# Altium PCB MINI_SYSTEM.PcbDoc
Units mil, origin at the board's own origin, x right, y up, seen from the top; angles counter-clockwise.
Board outline 1975.53 x 1581.83 mil, 2 copper layers (Top Layer, Bottom Layer); 48 components, 63 nets, 298 pads, 122 vias.
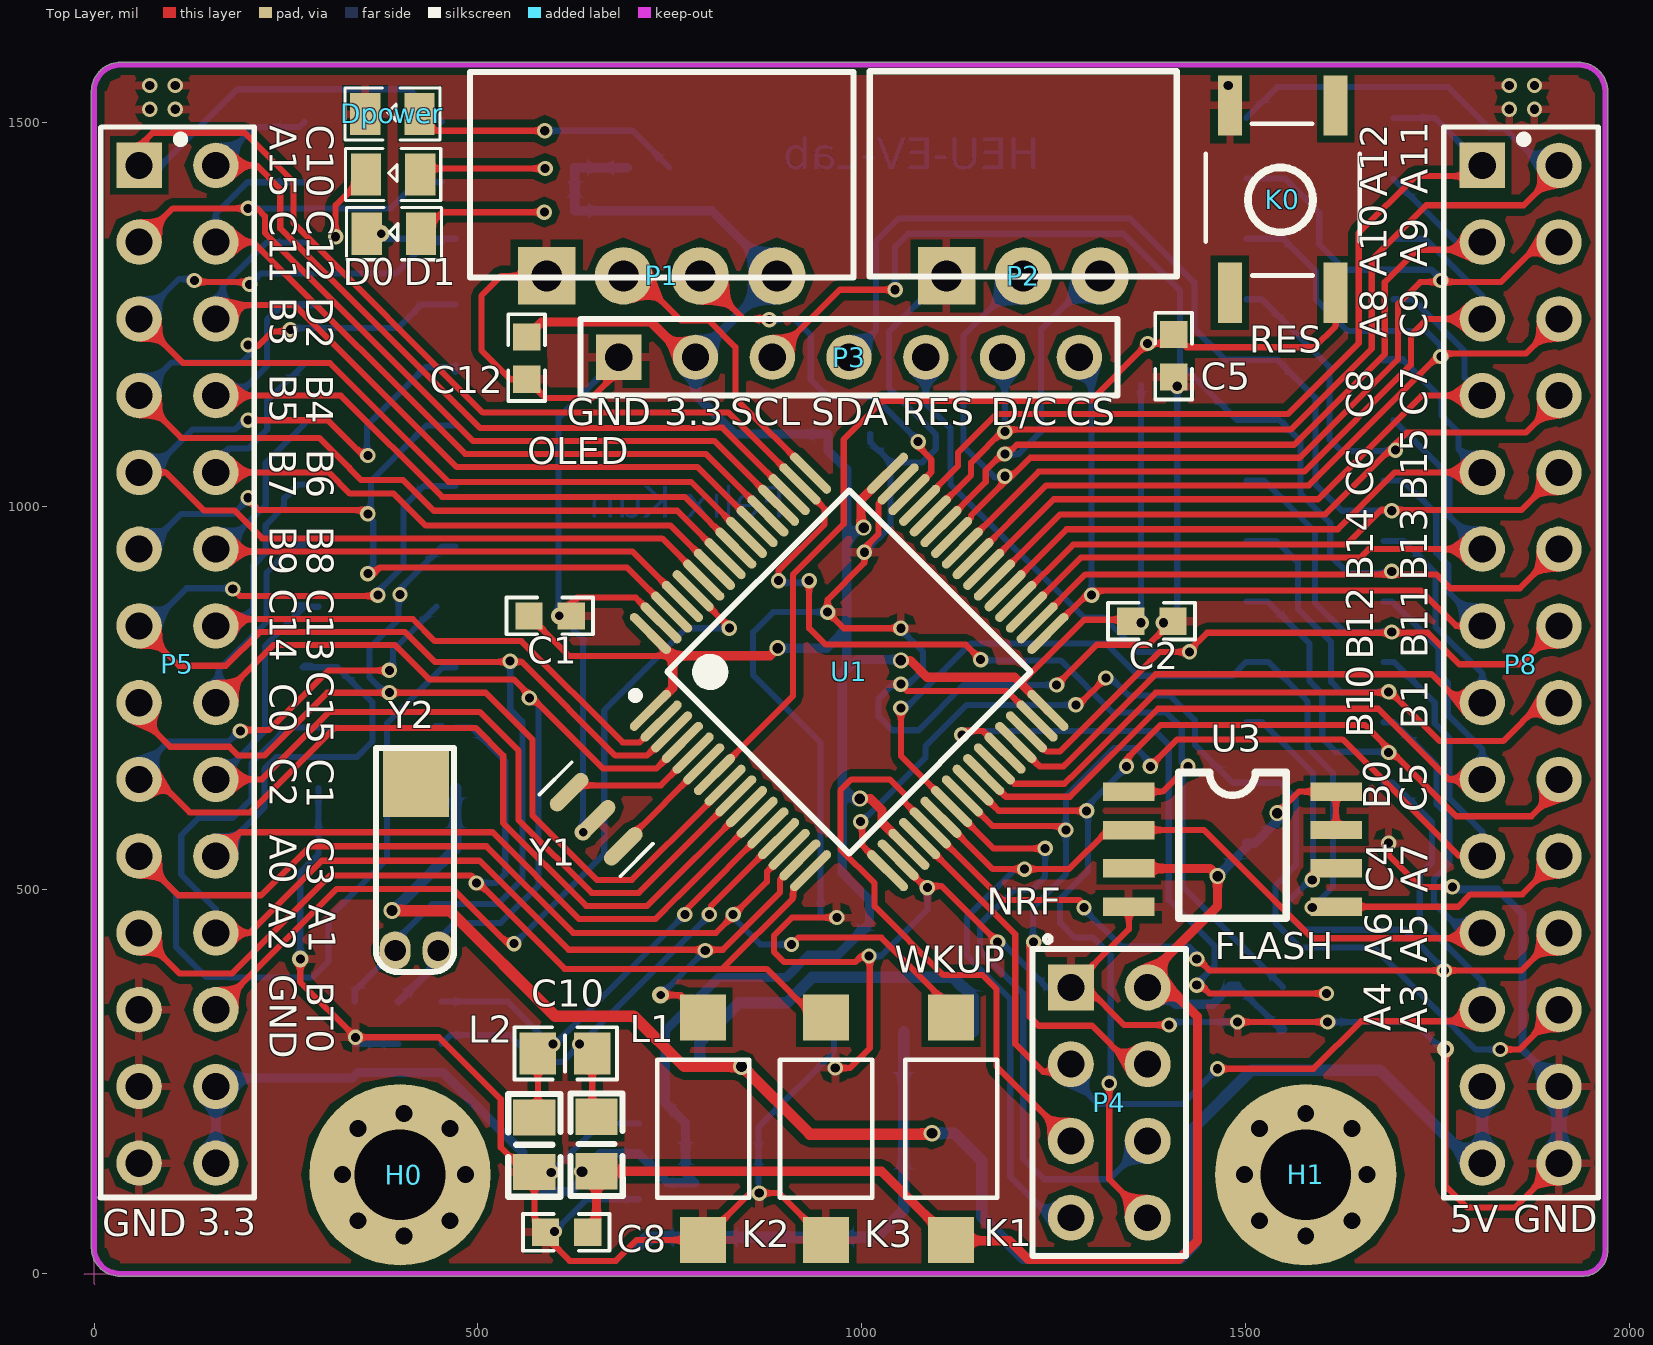
[diagram p0: Top Layer view]
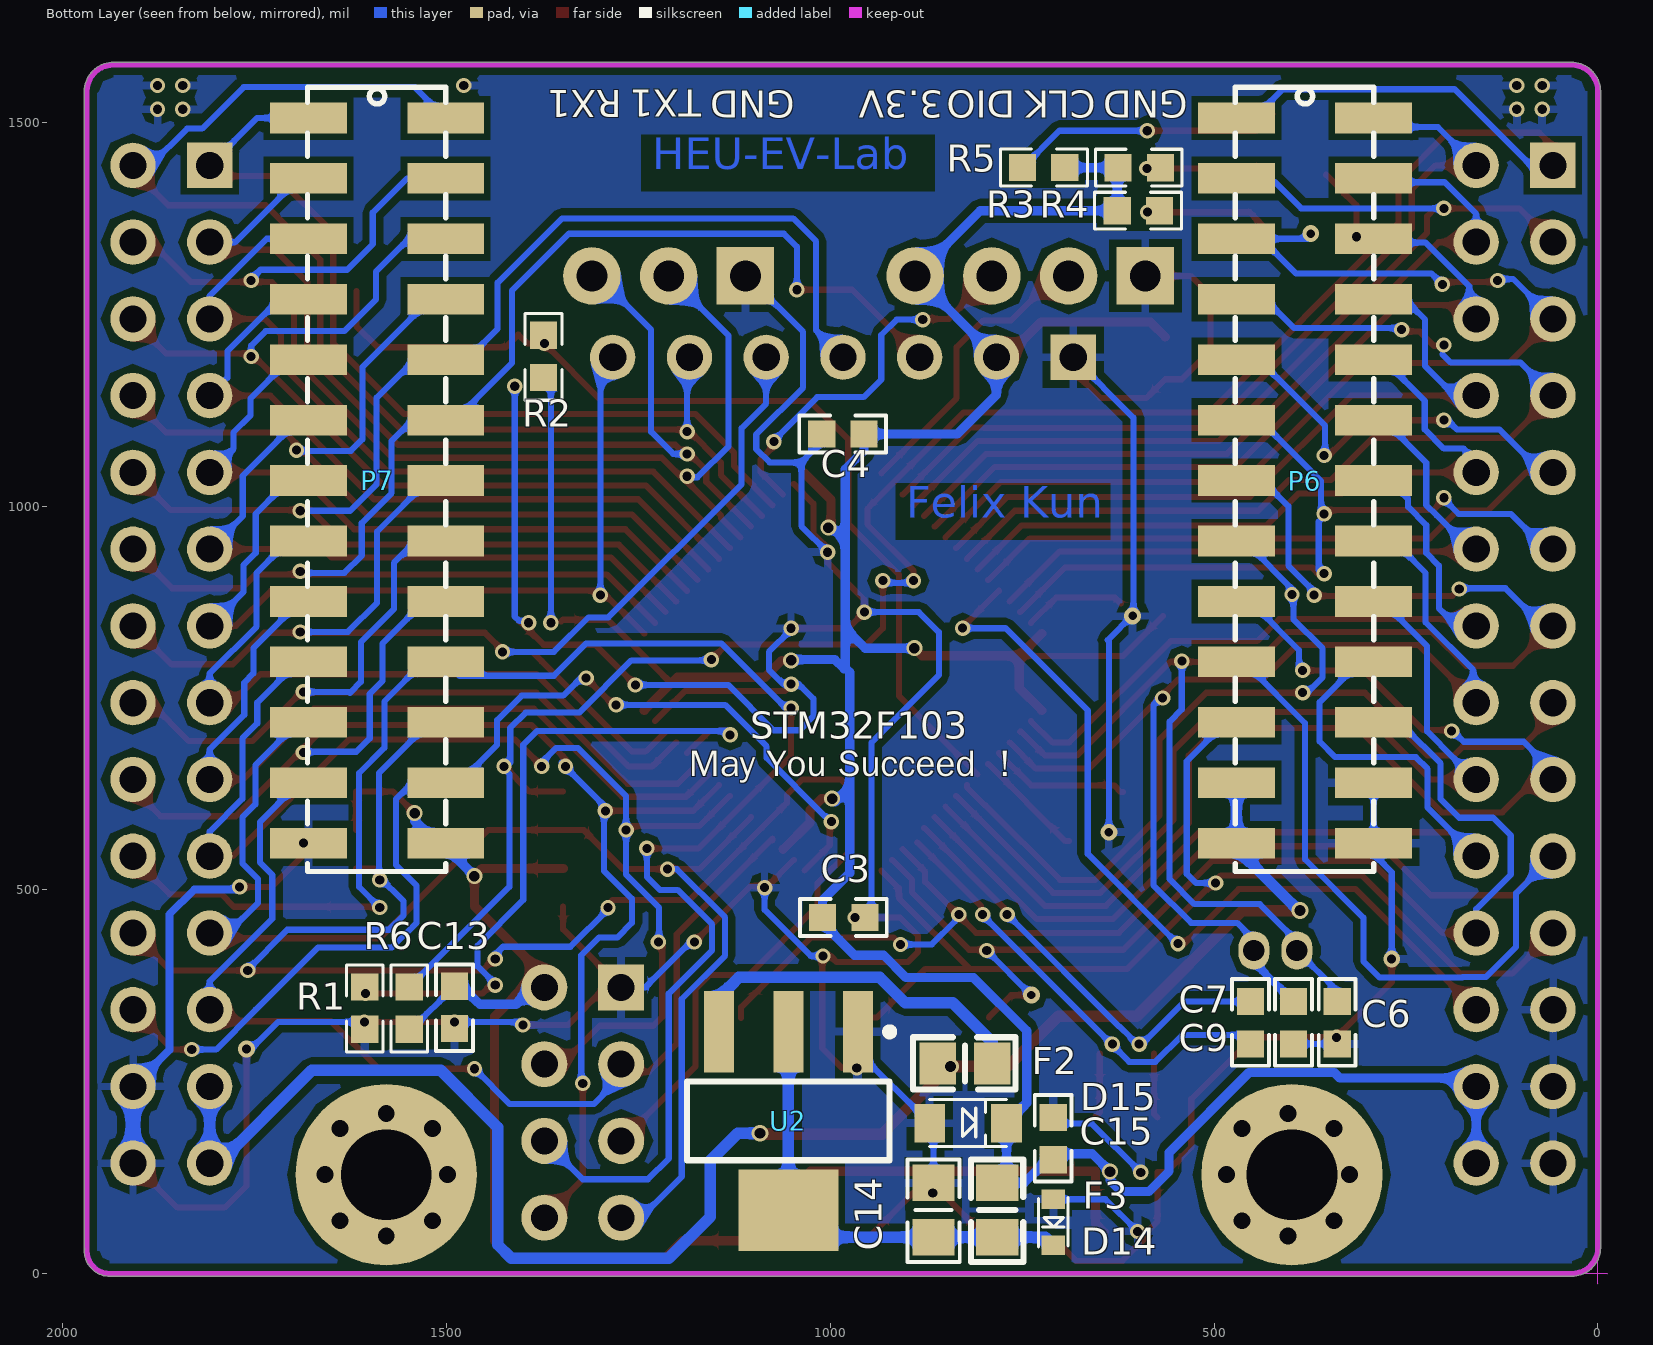
[diagram p1: Bottom Layer view, seen from below]
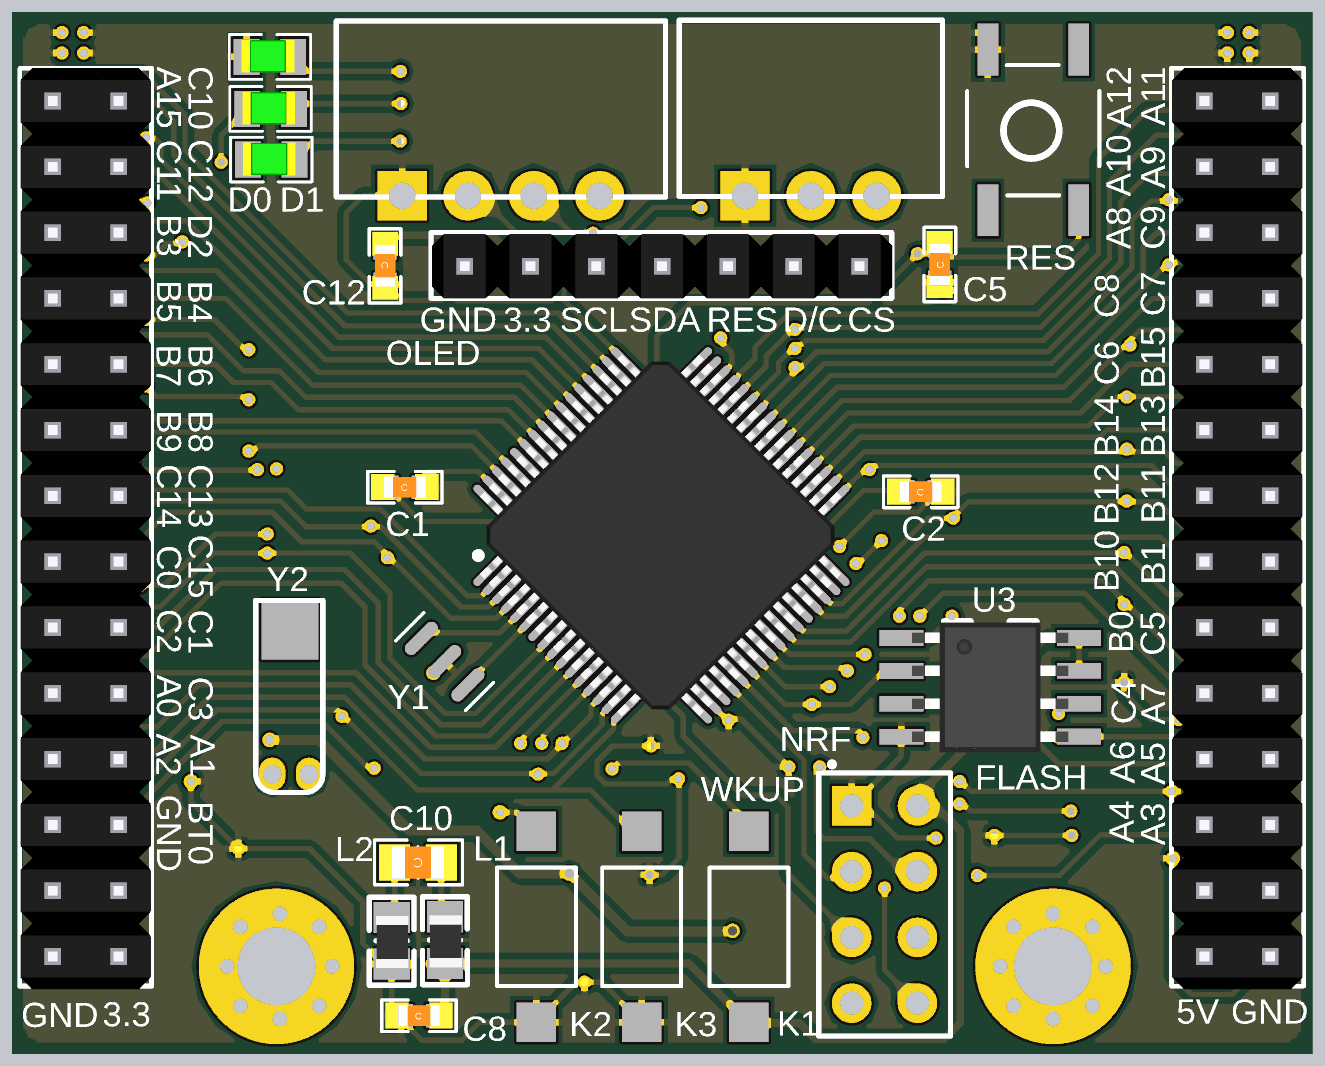
[diagram p2: 3D render of the assembled board from above, using the file's embedded part models]
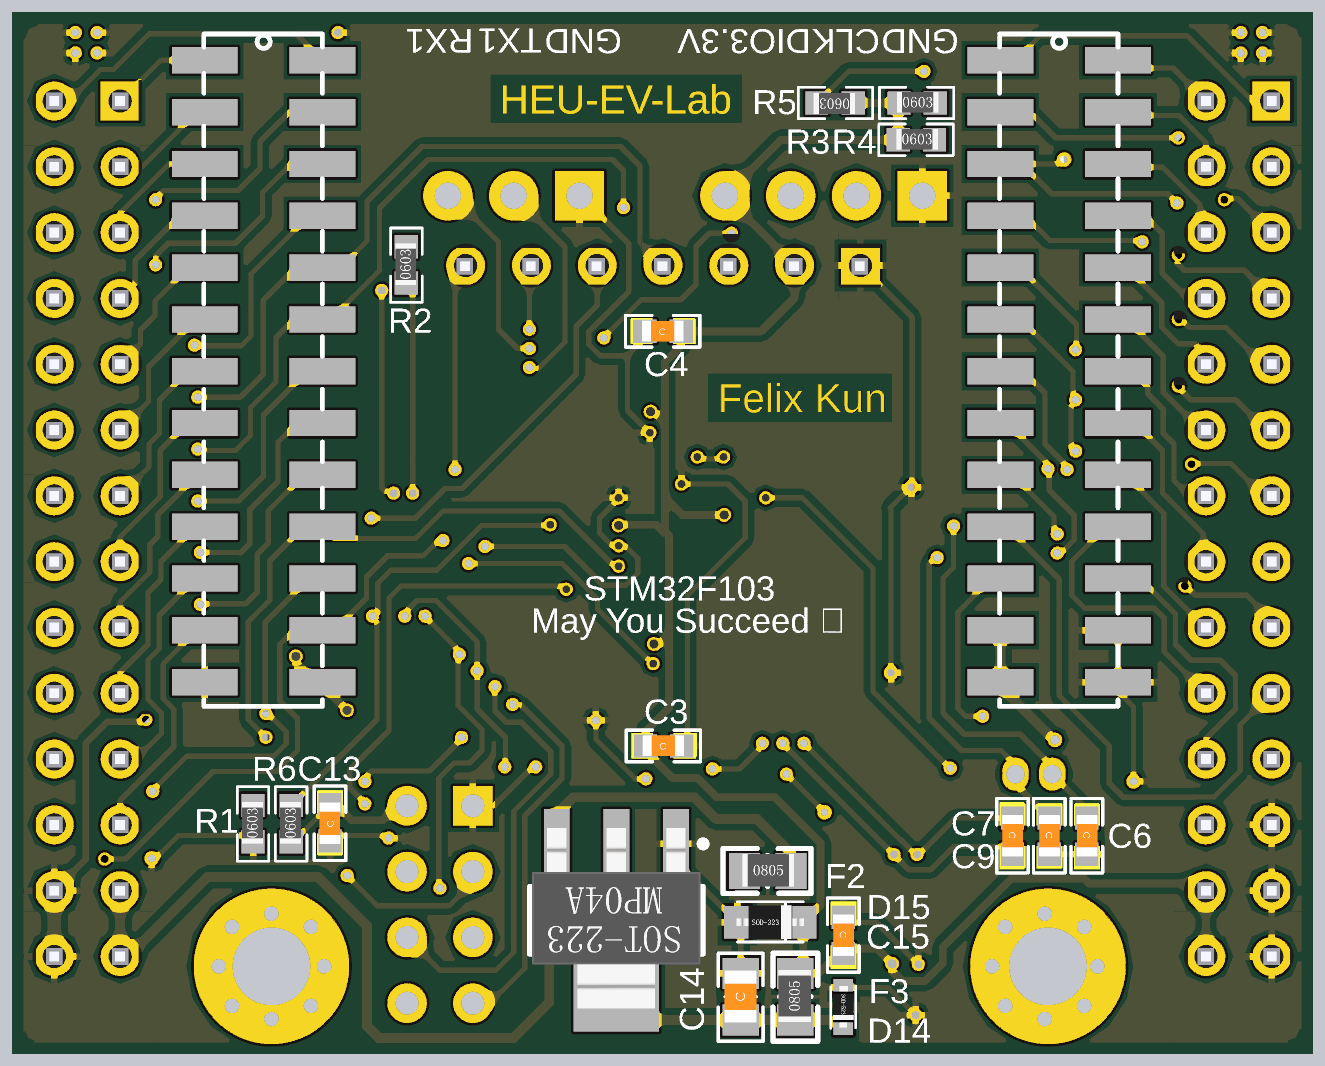
[diagram p3: 3D render of the assembled board from below, using the file's embedded part models]

## Layer stack, top to bottom
Top Solder: solder mask 0.4, Solder Resist, Dk 3.5
Top Layer: signal copper 1.4
Dielectric 1: dielectric 12.6, FR-4, Dk 4.8
Bottom Layer: signal copper 1.4
Bottom Solder: solder mask 0.4, Solder Resist, Dk 3.5

## Board outline
-3.52,33.9 ccw(c33.9,33.9) 33.9,-3.52 ccw(c33.9,0) 34.15,-3.51 ccw(c34.41,0) 34.41,-3.52 1938.5,-3.52 ccw(c1938.5,30) 1972.02,30 ccw(c1968.5,30) 1971.43,31.95 ccw(c1968.5,33.9) 1972.02,33.9 1972.02,1540.39 ccw(c1968.5,1540.39) 1972.02,1540.42 ccw(c1933.8,1540.1) 1933.48,1578.32 ccw(c1933.8,1540.1) 1933.47,1578.32 1933.5,1578.32 34.41,1578.32 ccw(c34.41,1540.39) -3.52,1540.39

## Design rules (kind name [scope] priority, off if disabled: settings)
Clearance MCU_Clearance [WithinRoom('MCU') vs WithinRoom('MCU')] p1: gap=5
Clearance [All] p2: gap=9
HoleSize [All] p1: absolutevalues=TRUE maxlimit=300 minlimit=11.81 maxpercent=80.000 minpercent=20.000
HoleToHoleClearance HoleToHoleClearance_mcu [WithinRoom('MCU')] p1: gap=0 allowstackedmicrovias=TRUE
HoleToHoleClearance [All] p2: gap=4 allowstackedmicrovias=TRUE
MinimumSolderMaskSliver [All] p1: minsoldermaskwidth=0
NetAntennae [All] p1: netantennaetolerance=2
PolygonConnect [All] p1: connectstyle=Relief reliefconductorwidth=10 reliefentries=4 polygonreliefangle="90 Angle" airgapwidth=10
RoomDefinition MCU [WithinRoom('MCU')] p1: confinementstyle=ConfineOut formatcopy=TRUE lockcomponents=FALSE outline 607.32,780.72 983.5,1156.9 1354.73,785.67 978.55,409.49
RoutingCorners [All] p1: cornerstyle=Round minsetback=20 maxsetback=200
RoutingVias [All] p1: holewidth=11.8 width=20 viastyle="Through Hole" minholewidth=11.7 minwidth=18 maxholewidth=248.03 maxwidth=254
SilkToSilkClearance [All] p1: silktosilkclearance=0
SilkToSolderMaskClearance [IsPad] p1: minsilkscreentomaskgap=0 clearancetoexposedcopper=TRUE
SolderMaskExpansion [All] p1: expansion=4
Width [All] p1: maxlimit=50 minlimit=7 preferedwidth=8
23 further rules are at their usual default settings.

## Components (designator, comment, footprint, x,y, rotation, side; value= is the part's Value field where it differs from the comment)
C1 "0603" CAP_0603_16*08 594,857 r0 top
C2 "0603" CAP_0603_16*08 1378,850 r0 top
C3 "0603" CAP_0603_16*08 982.5,463.9 r180 bottom
C4 "0603" CAP_0603_16*08 983.5,1093.9 r180 bottom
C5 "0603" CAP_0603_16*08 1406.5,1195.9 r90 top
C6 "0603" CAP_0603_16*08 339.5,326.9 r270 bottom
C7 "0603" CAP_0603_16*08 396.5,326.9 r270 bottom
C8 "0603" CAP_0603_16*08 615.5,53.9 r0 top
C9 "0603" CAP_0603_16*08 452.5,326.9 r270 bottom
C10 "Polar" CAP_0805_20*12 613.5,286.9 r180 top
C12 "0603" CAP_0603_16*08 563.5,1192.9 r270 top
C13 "0603" CAP_0603_16*08 1489.5,346.9 r90 bottom
C14 "Polar" CAP_0805_20*12 865.5,82.9 r90 bottom
C15 "0603" CAP_0603_16*08 709.5,175.9 r270 bottom
D0 "Red" LED_0805 389.5,1431.9 r180 top
D1 "Blue" LED_0805 390.5,1354.9 r180 top
D14 "TVS/3.3V" SOD523 709.5,116.9 r270 bottom
D15 "Zener/3.3V" SOD323 820.5,195.9 r180 bottom
Dpower "Green" LED_0805 388.5,1510.9 r180 top
F2 "8V1A" RES_0805_20*12 824.5,273.9 r180 bottom
F3 "5V/0.5A" RES_0805_20*12 782.5,82.9 r90 bottom
H0 "Pad3mm" PAD#1 403.5,128.9 r0 top
H1 "Pad3mm" PAD#2 1578.5,128.9 r0 top
K0 "KEY" KEY_4 1548.5,1399.9 r270 top
K1 "KEY" KEY_2 1106.5,193.9 r180 top
K2 "KEY" KEY_2 783.5,193.9 r180 top
K3 "KEY" KEY_2 943.5,193.9 r180 top
L1 "MODEL?" IND_0805_20*12 654.5,168.9 r90 top
L2 "MODEL?" IND_0805_20*12 573.5,167.9 r90 top
P1 "Header 4" P4_OUT 739.5,1299.9 r0 top locked
P2 "Header 3" P3_OUT 1210.5,1299.9 r0 top locked
P3 "OLED" HEADER1*7_PIN 983.5,1193.9 r0 top
P4 "NRF2401" HDR2X4 1272.5,372.9 r270 top
P5 "HEADER" HEADER2*14 108.5,793.9 r270 top locked
P6 "Header" HEADER2*13_SMD 381.5,993.9 r270 bottom
P7 "Header" HEADER2*13_SMD 1590.5,993.9 r270 bottom
P8 "HEADER" HEADER2*14 1858.5,793.9 r270 top locked
R1 "SMD" RES_0603_16*08 1606.5,345.9 r90 bottom
R2 "SMD" RES_0603_16*08 1373.5,1194.9 r90 bottom
R3 "SMD" RES_0603_16*08 597.5,1440.9 r180 bottom
R4 "SMD" RES_0603_16*08 598.5,1384.9 r180 bottom
R5 "SMD" RES_0603_16*08 722,1441 r0 bottom
R6 "SMD" RES_0603_16*08 1548.5,345.9 r90 bottom
U1 "STM32F103RCT6" LQFP64_N 983.5,783.9 r45 top locked
U2 "AMS1117" SOT223_M 1054.5,198.9 r270 bottom
U3 "W25Q64" SOIC-8 1348,628 r0 top
Y1 "XTAL_8M" 8M-cstcy 654,592 r135 top
Y2 "XTAL" XTAL32 420,531 r90 top

## Footprints (in the part's own frame and the unit in brackets; to place one, negate y for a bottom-side part, rotate by r counter-clockwise, add the part's x,y. Pads: shape width x height; smd on the part's side, far side on the other; paste and mask are expansions set on the pad)
8M-cstcy [mm]
  oval 0.5x1.6 smd: 1(-1.27,0) 2(1.27,0) 3(0,0)
  silkscreen extent -1.91,-0.76 1.9,0.76
CAP_0603_16*08 [mm]
  rect 0.9x0.9 smd: 1(-0.7,0) 2(0.7,0)
  silkscreen extent -1.45,-0.61 1.42,0.61, body extent -1.31,-0.49 1.29,0.51, height 0.89
CAP_0805_20*12 [mm] "Chip Resistor, Body 2.0x1.2mm, IPC Medium Density"
  rect 1.2x1.4 smd: 1(-0.9,0) 2(0.9,0)
  silkscreen extent -1.72,-0.87 1.67,0.86, body extent -1.5,-0.69 1.5,0.71, height 0.93
HDR2X4 [mil] "Connector; Header; 4x2 Position"
  rect 60x60 hole 35: 1(0,0)
  round 60 hole 35: 2(0,100) 3(100,0) 4(100,100) 5(200,0) 6(200,100) 7(300,0) 8(300,100)
  silkscreen extent -67,-50 350,150
HEADER1*7_PIN [mm] "Connector; Header; 7 Position"
  rect 1.5x1.5 hole 0.9: 1(-7.62,0)
  round 1.5 hole 0.9: 2(-5.08,0) 3(-2.54,0) 4(0,0) 5(2.54,0) 6(5.08,0) 7(7.62,0)
  silkscreen extent -8.89,-1.27 8.89,1.27, body extent -8.86,-1.28 8.92,1.22, height 3.03
HEADER2*13_SMD [mm]
  rect 1.016x2.54 smd: 1(-13,2.27) 2(-11,2.27) 3(-9,2.27) 4(-7,2.27) 5(-5,2.27) 6(-3,2.27) 7(-1,2.27) 8(1,2.27) 9(3,2.27) 10(5,2.27) 11(7,2.27) 12(9,2.27) 13(11,2.27) 14(11,-2.27) 15(9,-2.27) 16(7,-2.27) 17(5,-2.27) 18(3,-2.27) 19(1,-2.27) 20(-1,-2.27) 21(-3,-2.27) 22(-5,-2.27) 23(-7,-2.27) 24(-9,-2.27) 25(-11,-2.27) 26(-13,-2.27)
  silkscreen extent -14.02,-2.3 11.94,2.27
HEADER2*14 [mm]
  rect 1.5x1.5 hole 0.9: 1(-16.51,-1.27)
  round 1.5 hole 0.9: 2(-13.97,-1.27) 3(-11.43,-1.27) 4(-8.89,-1.27) 5(-6.35,-1.27) 6(-3.81,-1.27) 7(-1.27,-1.27) 8(1.27,-1.27) 9(3.81,-1.27) 10(6.35,-1.27) 11(8.89,-1.27) 12(11.43,-1.27) 13(13.97,-1.27) 14(16.51,-1.27) 15(16.51,1.27) 16(13.97,1.27) 17(11.43,1.27) 18(8.89,1.27) 19(6.35,1.27) 20(3.81,1.27) 21(1.27,1.27) 22(-1.27,1.27) 23(-3.81,1.27) 24(-6.35,1.27) 25(-8.89,1.27) 26(-11.43,1.27) 27(-13.97,1.27) 28(-16.51,1.27)
  silkscreen extent -17.5,-2.54 17.65,2.54, body extent -17.78,-2.52 17.78,2.52, height 3.03
IND_0805_20*12 [mm] "Chip Inductor, Body 2.0x1.2mm, IPC Medium Density"
  rect 1.2x1.4 smd: 1(-0.9,0) 2(0.9,0)
  silkscreen extent -1.72,-0.87 1.67,0.86, body extent -1.05,-0.65 0.95,0.6, height 0.5
KEY_2 [mil]
  rect 60x60 smd: 1(-9.76,150) 2(-9.76,-140)
  silkscreen extent -70,-85 50,95
KEY_4 [mm]
  rect 2x0.8 smd: 1(-3.1,-1.75) 2(3.1,1.75) 3(3.1,-1.75) 4(-3.1,1.75)
  silkscreen extent -2.5,-2.55 2.53,2.55
LED_0805 [mm]
  rect 1x1.4 smd: 1(-0.9,0) 2(0.9,0)
  silkscreen extent -1.57,-0.87 1.57,0.86, body extent -0.94,-0.66 1.09,0.61, height 1.1
LQFP64_N [mm]
  oval 1.8x0.3 smd: 1(-5.55,3.75) 2(-5.55,3.25) 3(-5.55,2.75) 4(-5.55,2.25) 5(-5.55,1.75) 6(-5.55,1.25) 7(-5.55,0.75) 8(-5.55,0.25) 9(-5.55,-0.25) 10(-5.55,-0.75) 11(-5.55,-1.25) 12(-5.55,-1.75) 13(-5.55,-2.25) 14(-5.55,-2.75) 15(-5.55,-3.25) 16(-5.55,-3.75) 33(5.55,-3.75) 34(5.55,-3.25) 35(5.55,-2.75) 36(5.55,-2.25) 37(5.55,-1.75) 38(5.55,-1.25) 39(5.55,-0.75) 40(5.55,-0.25) 41(5.55,0.25) 42(5.55,0.75) 43(5.55,1.25) 44(5.55,1.75) 45(5.55,2.25) 46(5.55,2.75) 47(5.55,3.25) 48(5.55,3.75)
  oval 0.3x1.8 smd: 17(-3.75,-5.55) 18(-3.25,-5.55) 19(-2.75,-5.55) 20(-2.25,-5.55) 21(-1.75,-5.55) 22(-1.25,-5.55) 23(-0.75,-5.55) 24(-0.25,-5.55) 25(0.25,-5.55) 26(0.75,-5.55) 27(1.25,-5.55) 28(1.75,-5.55) 29(2.25,-5.55) 30(2.75,-5.55) 31(3.25,-5.55) 32(3.75,-5.55) 49(3.75,5.55) 50(3.25,5.55) 51(2.75,5.55) 52(2.25,5.55) 53(1.75,5.55) 54(1.25,5.55) 55(0.75,5.55) 56(0.25,5.55) 57(-0.25,5.55) 58(-0.75,5.55) 59(-1.25,5.55) 60(-1.75,5.55) 61(-2.25,5.55) 62(-2.75,5.55) 63(-3.25,5.55) 64(-3.75,5.55)
  silkscreen extent -5.67,-4.25 4.25,4.57, body extent -6.03,-5.97 5.97,6.03, height 1.6
P3_OUT [mil]
  rect 75x75 hole 40: 1(-100,0)
  round 75 hole 40: 2(0,0) 3(100,0)
  silkscreen extent -200,-1 200,267
P4_OUT [mil]
  rect 75x75 hole 40: 1(-150,0)
  round 75 hole 40: 2(-50,0) 3(50,0) 4(150,0)
  silkscreen extent -250,-2 250,266
PAD#1 [mm]
  round 6 hole 3: 0(-0.127,0)
  round 1 hole 0.562: 1(0,2.032) 2(1.524,1.524) 3(2.032,0) 4(1.524,-1.524) 5(0,-2.032) 6(-1.524,-1.524) 7(-2.032,0) 8(-1.524,1.524)
  body extent -3.6,-3.12 3.6,3.12, height 3.33
PAD#2 [mm]
  round 6 hole 3: 0(0,0)
  round 1 hole 0.562: 1(0,2.032) 2(1.524,1.524) 3(2.032,0) 4(1.524,-1.524) 5(0,-2.032) 6(-1.524,-1.524) 7(-2.032,0) 8(-1.524,1.524)
  body extent -3.6,-3.12 3.6,3.12, height 3.33
RES_0603_16*08 [mm]
  rect 0.9x0.9 smd: 1(-0.7,0) 2(0.7,0)
  silkscreen extent -1.45,-0.61 1.42,0.61, body extent -0.77,-0.37 0.83,0.43, height 0.5
RES_0805_20*12 [mm] "Chip Resistor, Body 2.0x1.2mm, IPC Medium Density"
  rect 1.2x1.4 smd: 1(-0.9,0) 2(0.9,0)
  silkscreen extent -1.72,-0.87 1.67,0.86, body extent -0.97,-0.6 1.03,0.66, height 0.68
SOD323 [mil] "Zener Doide"
  rect 40x50 smd: 1(-50,0) 2(50,0)
  silkscreen extent -50,-30 50,31, body extent -51,-26 51,26, height 39
SOD523 [mil]
  rect 25x30 smd: 1(20,0) 2(80,0)
  silkscreen extent 18,-19 82,19, body extent 18,-16 81,16, height 26
SOIC-8 [mil]
  rect 66.93x24 smd: 1(0,0) 2(0,-50.06) 3(0,-100.06) 4(0,-150.06) 5(270,-150) 6(270,-100) 7(270,-50) 8(270,0)
  silkscreen extent 65,-165 205,25, body extent 16,-174 254,24, height 63
SOT223_M [mm] "SOT223, 4-Leads, Body 6.5x3.5mm, Pitch 2.3mm, Lead Span 7mm, IPC Low Density"
  rect 2.7x1 smd: 1(-2.95,2.3) 2(-2.95,0) 3(-2.95,-2.3)
  rect 2.7x3.3 smd: 4(2.95,0)
  silkscreen extent -3.07,-3.35 1.3,3.47, body extent -3.56,-3.25 3.4,3.25, height 1.73
XTAL32 [mil]
  oval 50x40 hole 28: 1(-110,28) 2(-110,-28)
  rect 92.13x86 smd: ""(110,1)
  silkscreen extent -138,-49 154,53

## Part data
C1 C2 C3 C4 C5 C6 C7 C8 C9 C12 C13 C15: library part Cap, "Capacitor"
C10 C14: library part "Cap Pol", "Polarized Capacitor (Axial)"
D0 D1 Dpower: library part LED, "Typical RED, GREEN, YELLOW, AMBER GaAs LED"
D14 D15: library part "D Zener", "Zener Diode"
F2 F3: library part "Fuse 1", "Fuse"
L1 L2: library part Inductor, "Inductor"
P1: "Header, 4-Pin"
P2: "Header, 3-Pin"
P3: library part "Header 7", "Header, 7-Pin"
P4: library part "Header 8", "Header, 8-Pin"
P5 P8: library part Header14*2
P6 P7: library part Header13*2
R1 R2 R3 R4 R5 R6: library part RES_SMD, "Resistor"
U1: library part STM32F103RBT6
U3: "flash"
Y2: "Crystal Oscillator"

## Via types
v1: diameter 20, hole 11.81, Top Layer to Bottom Layer, 92 vias
v2: diameter 20, hole 12, Top Layer to Bottom Layer, 14 vias
v3: diameter 21, hole 13.8, Top Layer to Bottom Layer, 7 vias
v4: diameter 22, hole 11, Top Layer to Bottom Layer, 4 vias
v5: diameter 22, hole 14, Top Layer to Bottom Layer, 3 vias
v6: diameter 22, hole 11.7, Top Layer to Bottom Layer, 2 vias

## Nets (pads, with @x,y where several pads share a name; then routed paths per layer and width w, separated by ;. In a path a pad name is that pad's centre, name@x,y a point inside that pad or via, vN(x,y) a via of type N, cw(c..) or ccw(c..) an arc to the next point about the centre after c; other vN are vias at no path point)
BOOT0: P5.17 U1.60 | length 1111.5
  Top Layer w8: P5.17 315.5,500.9 468.1,500.9 539,430 v1(547,430) ; U1.60 827.5,842.46 v1(827.5,840.9)
  Bottom Layer w8: v1(547,430) 547.61,430 664.5,546.9 664.5,733.9 771.5,840.9 v1(827.5,840.9)
FLASH_CS: P5.1 P6.26 R6.2 U1.50 U3.1 | length 2859.2
  Top Layer w8: P5.1 58.5,1468.9 76.03,1486.43 195.98,1486.43 259.5,1422.9 259.5,1368.9 506.5,1121.9 826.46,1121.9 U1.50 951.5,996.85 951.5,975.9 891.5,915.9 v1@891.5,904.9 ; v1(931.5,902.9) 931.5,840.9 952.9,819.5 1135.5,819.5 v1(1155,800) ; U3.1 1392,628 v1(1425,661)
  Bottom Layer w8: P5.1 87.5,1443.9 186.61,1543 410.58,1543 P6.26@452.87,1500.71 ; v1@889.5,899.9 v1@929.5,899.9 ; v1(1155,800) 1156,799 1259,799 1327,731 1397,731 1417,711 1417,666 1425,658 1418,651 1418,503.96 R6.2
  other v1: 891.5,902.9
GND: C1.2 C2.2 C3.2 C4.1 C5.1 C6.2 C7.2 C8.1 C12.2 C13.1 C14.2 C15.1 D14.1 D15.1 Dpower.2 K0.1 K2.1 K3.1 L2.1 P1.1 P2.1 P3.1 P4.1 P5.12 P5.13 P5.14 P6.12 P6.13 P7.14 P8.15 P8.16 R1.1 U1.18 U1.31 U1.47 U1.63 U2.1 U3.4 Y1.3 | length 7956
  Top Layer w8: v6(268.5,409.9) 268.5,379.9 v1(340.5,307.9) 449.1,307.9 529.61,227.39 529.61,164.39 561.54,132.46 L2.1 573.5,68.34 C8.1 587.94,48.06 619.5,16.5 679.5,16.5 706.9,43.9 K2.1 854.27,104.9 v2(866.5,104.9) 892.27,104.9 K3.1 ; P1.1 530.5,1299.9 504.5,1273.9 504.5,1202.9 542.06,1165.34 C12.2 587.94,1140.9 648.5,1140.9 683.5,1175.9 P3.1 ; C1.2@621.56,873 629.46,880.9 705.55,880.9 U1.63 ; v1(965.5,267.9) 984.5,267.9 1010.5,293.9 1010.5,412.9 v1(1009.5,413.9) 999.5,413.9 991.5,405.9 898.98,405.9 885.5,419.37 885.5,440.29 909.11,463.9 v1(967.5,463.9) ; v2@1047.5,840.9 976.5,840.9 v1(955.5,861.9) 955.5,877.9 1003.5,925.9 v1(1003.5,939.9) 1003.5,945.32 1022,963.82 1022,1003.35 U1.47 ; U1.18 1083.55,502.9 v1(1085.5,502.9) 1087.61,505 1104,505 v1(1177,432) ; v1@1050.5,767.5 1059,759 1189.35,759 U1.31 ; v1(1254,767) 1306.28,819.28 1373.54,819.28 1404.26,850 C2.2 C2.2@1404.16,850 ; U3.4 1348,448.39 P4.1 1293.1,372.9 1342.1,323.9 v1@1395.5,323.9 ; v1(1489.5,327.9) v1@1608.5,327.9 ; v1(1686.5,560.83) 1686.5,544.9 1727.5,503.9 v1(1769.5,503.9) ; v6@1762.5,294.9 v6(1760.5,292.9) 1760.5,114.5 1789.01,86 1850.61,86 P8.15
  Bottom Layer w8: v6(268.5,409.9) 268.5,522.9 292.13,546.53 P6.12@292.13,632.57 ; C6.2 C7.2 ; v1(595.5,131.9) 659.19,195.58 C15.1@709.5,195.58 ; v1(599.5,54.9) 641.5,96.9 D14.1 ; v4(637,575) 637,823.99 638.5,825.5 605,859 605,1115.39 P3.1 ; C14.2 865.5,190.9 D15.1 963.95,289.35 U2.1 ; v1(955.5,861.9) 884.5,861.9 858.5,835.9 858.5,779.9 946.5,691.9 946.5,463.9 v1(967.5,463.9) ; v1(1003.5,939.9) 1037.5,973.9 1037.5,1056.9 ; v1(1009.5,413.9) 1025.5,413.9 1085.5,473.9 v1(1085.5,502.9) ; C4.1 1011.06,1083.34 1037.5,1056.9 ; v2(1051,840.9) 1051,839 1080,810 1080,787 1061,768 v1(1051,768) 1041,768 1022,749 1022,726 1040,708 1074,708 1133,767 v1(1254,767) ; P2.1 1108.5,1299.9 1035.5,1226.9 1035.5,1154.42 1096.5,1093.42 1096.5,1074.37 1079.03,1056.9 1037.5,1056.9 ; v1@1177,437 1241.1,372.9 P4.1 ; v1@1393,851 1406,851 1411,856 v2(1411,1156) ; v1@1395.5,323.9 1399.5,327.9 v1(1489.5,327.9) ; R1.1@1608.5,327.9 1719.5,327.9 1760.5,286.9 v6(1760.5,292.9)
  Bottom Layer w10: v1(1769.5,503.9) 1773.03,500.37 1828.63,500.37 1861,468 1861,291.4 P8.16
  Bottom Layer w20: P8.15 P8.16
  other v1: 1400.5,323.9 1607,327.9 1393,848 1477.5,1547.9
  other v2: 72.5,1516.9 105.5,1516.9 1843.5,1516.9 1876.5,1516.9 72.5,1547.9 105.5,1547.9 1843.5,1547.9 1876.5,1547.9
  other v4: 606,857
KEY0: K2.2 P5.18 P6.11 U1.15 | length 1507.7
  Top Layer w8: P5.18 202.5,443.9 296.5,537.9 502.1,537.9 618,422 819.13,422 893.5,496.37 893.5,512.95 U1.15 ; v4(738,363) 764.17,363 K2.2
  Bottom Layer w8: P5.18@171,456.4 P5.18 158.5,474.9 113.5,519.9 113.5,570.9 136.5,593.9 180.5,593.9 204.8,618.19 204.8,664.66 251.45,711.31 P6.11@317.09,711.31 ; v4(738,363) v2(796,421)
KEY1: K3.2 P5.11 P6.16 U1.16 | length 1500.8
  Top Layer w8: P5.11 111.5,390.9 179.5,390.9 307.5,518.9 491.1,518.9 613,397 876,397 939.1,333.9 K3.2 ; 819.09,397.91 910.5,489.33 910.5,502.11 U1.16
  Bottom Layer w8: P6.16@444.64,713.31 P6.16@452.87,713.31 ; P6.16@470.87,711.31 491.69,711.31 535.5,667.5 535.5,520.9 523.61,509 v1(498,509)
LED0: D0.2 P5.26 P6.3 U1.54 | length 1097.5
  Top Layer w8: P5.26 176.5,1261.9 261.5,1261.9 472.5,1050.9 786.1,1050.9 U1.54 ; v1@314.5,1346.9 314.5,1391.9 354.07,1431.46 D0.2
  Bottom Layer w8: P5.26@167.45,1252.84 167.45,1286.37 224.31,1343.23 P6.3@274.13,1343.23
  other v1: 314.5,1350.9
LED1: D1.2 P5.3 P6.24 U1.55 | length 1473.7
  Top Layer w8: P5.3@58.5,1223.9 P5.3 115.5,1186.9 115.5,1186.43 306.98,1186.43 462.02,1031.38 777.78,1031.38 U1.55 ; v1@130.5,1291.9 201.5,1291.9 202.5,1292.9 v1(202.5,1288.9)
  Bottom Layer w8: P5.3 110.5,1295.9 126.5,1295.9 v1@130.5,1291.9 ; v1(202.5,1288.9) 216.5,1302.9 392.9,1302.9 433.23,1343.23 P6.24@452.87,1343.23 ; v4(374,1355) 380.77,1348.23 P6.24
  other v1: 130.5,1293.9
NetC14_1: C14.1 D14.2 F3.1 U2.2 U2.4 | length 596.3
  Bottom Layer w15: D14.2 720.07,47.46 F3.1 C14.1 1019.21,47.46 U2.4 U2.2
NetD0_1: D0.1 R3.2 | length 154
  Top Layer w8: D0.1@433.5,1439.9 v1(587.5,1439.9)
NetD1_1: D1.1 R4.2 | length 173
  Top Layer w8: D1.1 454.94,1383.9 455.94,1382.9 v1(586.5,1382.9)
NetDpower_1: Dpower.1 R5.2 | length 356.6
  Top Layer w8: Dpower.1 445.83,1489 v1(587,1489) v1@589,1489
  Bottom Layer w8: v1(587,1489) 701.56,1489 R5.2
NetF2_2: F2.2 U2.3 | length 474.4
  Bottom Layer w15: F2.2 789.07,301.46 840.5,352.9 902.5,352.9 935.5,385.9 1119.5,385.9 1145.06,360.35 U2.3
NetR1_2: R1.2 U1.28 | length 863
  Top Layer w8: v1(1130.5,701.9) 1135.5,706.9 1157.94,706.9 U1.28 ; v1@1436.5,381.9 1453.5,364.9 v1(1605.5,364.9)
  Bottom Layer w8: v1@1135.5,706.9 1382.1,706.9 1400,689 1400,487 1459.5,427.5 1459.5,400.37 1442.5,383.37 v1@1442.5,375.9
  other v1: 1436.5,375.9
NRF_CE: P4.3 P7.15 P8.12 U1.20 | length 1398.3
  Top Layer w8: U1.20@1075.37,564.24 U1.20 1200,442.13 1200,299.4 1236.5,262.9 P4.3@1274.5,262.9 ; v1(1463.5,266.9) 1588.5,266.9 1650.5,328.9 1793.5,328.9 P8.12
  Bottom Layer w8: P4.3 1272.5,256.5 1308.1,220.9 1417.5,220.9 v1(1463.5,266.9) ; P7.15 1691.83,639.57 1742.87,588.53 1742.87,535.44 1727,519.57 1727,462.36 1808.5,380.86 P8.12
NRF_CS: P4.4 P7.17 P8.10 U1.24 | length 1605.4
  Top Layer w8: U1.24 1170.48,583 1265,583 v1@1266,582 ; v1(1224,432) 1219,427 1219,334.4 1230.5,322.9 1300.1,322.9 1350.1,272.9 P4.4 ; v1@1376,666 1381,666 1411,696 1626.4,696 1778.5,543.9 P8.10
  Bottom Layer w8: v1@1223,428 1223,476.96 1266,519.96 v1@1266,570 ; v1(1266,578) 1266,622 1329,685 1357,685 1376,666 v1(1376,661) ; P7.17 1693.35,797.05 1746.5,743.9 1746.5,716.9 1765.98,697.43 1765.98,618.43 1808.5,575.9 P8.10
NRF_IRQ: P4.8 P7.9 P8.20 U1.25 | length 1871.6
  Top Layer w8: U1.25 1178.32,603 v1(1293,603) ; v1(1322.5,247.9) 1322.5,122.9 P4.8 ; v1@1345,665.04 v1(1345,661) 1345,670.53 1389.47,715 1655.4,715 1774.5,595.9 1872.5,595.9 1908.5,631.9 P8.20
  Bottom Layer w8: v1(1322.5,247.9) 1324.5,249.9 1324.5,414.9 1301.5,437.9 1277.5,437.9 1258.5,456.9 1258.5,488.42 1295,524.92 1295,606 1288,603 v1@1346,661 ; v1(1345,661) v1@1350,666 ; P7.9 1528.61,875.79 1583.5,820.9 1583.5,771.9 1600,755.4 1600,697.4 1617.5,679.9 1686.5,679.9 v1(1686.5,678.9)
OLED_CS: P3.7 P7.20 P8.7 U1.33 | length 1182.4
  Top Layer w8: U1.33 1298.3,889.9 1728.5,889.9 1774.5,843.9 P8.7
  Bottom Layer w8: P3.7 1299.5,1177.9 v1(1299.5,883.9) ; P7.20 1705.13,1033.27 1748.5,989.9 1748.5,938.9 1764.5,922.9 1764.5,887.9 P8.7
OLED_DC: P3.6 P7.1 P8.28 U1.44 | length 1652.6
  Top Layer w8: U1.44 1142.5,1040.33 1142.5,1056.42 1185.98,1099.9 1559.34,1099.9 1664.5,1205.06 1664.5,1320.9 1735.5,1391.9 1862.5,1391.9 1908.5,1437.9 P8.28
  Bottom Layer w8: v1@1186.5,1095.9 P3.6@1186.5,1192.9 ; P7.1 1541.43,1546 1764.4,1546 1818.5,1491.9 1837.94,1491.9 1885.94,1443.9 P8.28
  other v1: 1186.5,1096.9
OLED_RES: P3.5 P7.7 P8.22 U1.30 | length 1710.9
  Top Layer w8: U1.30 1239.62,680.9 1240.72,680.9 1241.53,680.08 1257.96,680.08 1375.77,797.9 1376.2,797.9 1388.3,810 1425,810 1449.9,834.9 1737.5,834.9 1778.5,793.9 1858.5,793.9 P8.22
  Bottom Layer w8: P3.5 1083.5,1133.5 1115.5,1101.5 1115.5,1028.5 1289,855 1315,855 1360,810 1421,810 v1@1424,807 ; P7.7 1524.13,1033.27 1590.5,966.9 1590.5,873.9 1628.35,836.05 v1(1690.5,836.05)
  other v1: 1427,810
OSC_IN1: C6.1 P5.7 P6.20 U1.3 Y2.1 | length 1965
  Top Layer w8: P5.7@83.5,843.9 P5.7 110.5,791.9 171.5,791.9 215.5,835.9 405.1,835.9 444,797 557,797 679,675 720.21,675 751.16,705.95 U1.3 ; v1(180.5,891.9) 189.5,882.9 v1@362.5,882.9
  Bottom Layer w8: P5.7 71.5,843.9 120.5,892.9 v1@178.5,892.9 ; C6.1 339.5,368.5 Y2.1 392,433 440.5,481.5 525.5,481.5 558,514 558,719 542,735 v1(542,798) ; v1@364.5,884.9 371.5,891.9 372.44,891.9 403,922.46 403,1000 429.27,1026.27 P6.20@470.87,1026.27
  other v1: 369.5,883.89
OSC_IN2: U1.5 Y1.2 | length 182.7
  Top Layer w8: Y1.2 621.36,627.36 630,636 738.17,636 U1.5
OSC_OUT1: C7.1 P5.21 P6.8 U1.4 Y2.2 | length 1493.8
  Top Layer w8: P5.21 233.5,818.9 392.1,818.9 437,774 547,774 663,658 732.33,658 U1.4
  Bottom Layer w8: P5.21 162.5,747.9 162.5,786.5 224.5,848.5 224.5,912.9 261.13,949.53 P6.8@274.13,949.53 ; Y2.2@448,435 469.98,456.98 529.98,456.98 579,506 579,741 570,750 v1(567,750)
  Bottom Layer w10: C7.1 448,405.95 Y2.2 Y2.2@448,435
OSC_OUT2: U1.6 Y1.1 | length 147
  Top Layer w8: Y1.1@688.86,563.54 693.55,563.54 U1.6
PA0: K1.2 P5.10 P6.17 U1.14 | length 2174.7
  Top Layer w8: P5.10 109.5,492.9 217.5,492.9 281.5,556.9 511.1,556.9 624,444 810.13,444 876.5,510.37 876.5,523.78 U1.14 ; v1(908.5,428.9) 917.5,437.9 1025.5,437.9 1116.27,347.13 K1.2@1116.27,332.9
  Bottom Layer w8: P5.10 106.5,495.9 106.5,425.9 145.98,386.43 176.12,386.43 176.65,385.9 284.5,385.9 305.5,406.9 305.5,463.9 381.5,539.9 381.5,717.32 454.23,790.05 P6.17@470.87,790.05 ; v1@837.5,468.9 837.5,458.9 867.5,428.9 v1(908.5,428.9)
  other v1: 832.5,467.9
PA3: P7.12 P8.17 U1.17 | length 1464
  Top Layer w8: v1(998.5,588.9) 1000.71,586.69 1000.71,557.9 U1.17 ; v1(1279,741) 1283,741 v1(1318,776) ; v2(1832,292) 1856.61,292 P8.17
  Bottom Layer w8: v1(998.5,588.9) 1005.5,595.9 1007.03,595.9 1083,671.87 1083,687 1137,741 v1(1279,741) ; v1(1318,776) 1325,776 1348,753 1402,753 1434,721 1434,689 1483.43,639.57 P7.12 1544.43,639.57 1565.87,618.13 1565.87,532.4 1539,505.53 1539,457 1571,425 1667.4,425 1748.5,343.9 1748.5,343.75 1800.26,292 v2(1832,292) ; P8.17@1908.5,327.9 P8.17
PA5: P4.5 P7.11 P8.18 U1.21 U3.6 | length 2290.7
  Top Layer w8: P4.5 1175.5,269.9 1175.5,370.9 1157.4,389 1106.4,389 1016.76,478.64 1016.76,508.64 972.18,553.22 972.18,629.57 986.5,643.9 1036.5,643.9 1056.5,623.9 1056.5,613.46 U1.21 1183.07,486.9 1283.5,486.9 1289.5,480.9 v1@1289.5,475.9 ; P4.5@1274.5,162.9 P4.5@1281.5,162.9 ; v1@1438.5,409.9 1453.5,394.9 v1(1758.98,394.9) 1859.5,394.9 P8.18 ; v1(1587,513) 1583,517 1594,528 U3.6
  Bottom Layer w8: v1(1289.5,476.9) 1289.5,474.9 1338.5,425.9 1426.5,425.9 1438.5,413.9 1437.5,412.9 v1@1437.5,409.9 ; P7.11 1521.69,718.31 1588,652 1588,517.39 1556,485.39 1556,467 1575,448 1707.4,448 1760.5,394.9 v1(1758.98,394.9)
  other v1: 1436.5,409.9
PA6: P4.7 P7.16 P8.11 U1.22 U3.2 | length 1745.3
  Top Layer w8: U1.22 1170.8,527 1270,527 1320.94,577.94 U3.2 1446.06,577.94 1587,437 1801.61,437 P8.11
  Bottom Layer w8: v1(1212,527) 1200,527 1137,464 1137,414.31 1193.5,357.81 1193.5,126.5 1247.1,72.9 P4.7 ; P7.16 1693.09,718.31 1748.98,662.43 1748.98,611.38 1765.98,594.38 1765.98,534.5 1745.5,514.03 1745.5,482.9 1784.5,443.9 P8.11
PA7: P4.6 P7.10 P8.19 U1.23 U3.5 | length 2225.9
  Top Layer w8: v2(1051,737) 1051,674.64 U1.23 1171.64,554 v1(1239,554) ; U3.5@1585,478 U3.5 1777,478 1793,494 1860.61,494 1908.5,541.9 P8.19
  Bottom Layer w8: v2@1051,739 1060,739 1142,821 1318,821 1360,779 1483.09,779 P7.10 1529.35,797.05 1581,745.4 1581,685 1614,652 1614,504 v1(1587,477) ; v1(1239,554) 1239,517 1222,500 1199,500 1154,455 1154,421.36 1210.5,364.85 1210.5,149.9 1237.5,122.9 1322.5,122.9 P4.6
PA8: P7.24 P8.3 U1.41 | length 1000.4
  Top Layer w8: U1.41 1230.58,1044.9 1576.46,1044.9 1715.5,1183.94 1715.5,1222.9 1736.5,1243.9 P8.3
  Bottom Layer w8: P7.24@1692.87,1348.23 1734.17,1348.23 1808.5,1273.9 P8.3
PA9: P2.2 P7.2 P8.27 U1.42 | length 1659.6
  Top Layer w8: U1.42 1142.53,984.69 1142.53,987.93 1186.5,1031.9 v1(1186.5,1038.9) 1195.5,1038.9 1219.5,1062.9 1570.42,1062.9 1698.5,1190.98 1698.5,1262.9 1727.5,1291.9 1747.5,1291.9 1754.5,1298.9 1761.5,1291.9 1832.5,1291.9 1884.5,1343.9 P8.27
  Bottom Layer w8: v1@1185,1037.4 1173,1037.4 1132.5,1077.9 1132.5,1221.9 P2.2 ; P7.2 1551.43,1426.97 1596,1382.4 1596,1341.4 1629.5,1307.9 1742.5,1307.9 1751.5,1298.9 v1@1754.5,1298.9 ; P8.27 P8.27@1908.5,1344.9
  other v1: 1754.5,1293.9
PA10: P2.3 P7.25 P8.2 U1.43 | length 1371.2
  Top Layer w8: U1.43 1161.5,1031.49 1161.5,1046.42 1188.98,1073.9 1196.03,1073.9 1202.03,1079.9 1563.38,1079.9 1681.5,1198.02 1681.5,1291.9 1723.5,1333.9 1798.5,1333.9 P8.2
  Bottom Layer w8: v1(1186.5,1067.9) 1204.5,1067.9 1233.5,1096.9 1233.5,1229.9 1303.5,1299.9 P2.3 ; P7.25@1692.87,1426.97 1692.87,1426 1774.98,1343.9 P8.2
PA12: P7.26 P8.1 U1.45 | length 1153
  Top Layer w8: U1.45 1100.24,1025.91 1100.24,1027.1 1125.5,1052.37 1125.5,1069.9 1175.5,1119.9 1555.3,1119.9 1647.5,1212.11 1647.5,1355.9 1721.5,1429.9 1794.5,1429.9 P8.1
  Bottom Layer w8: P7.26@1692.87,1505.71 1746.69,1505.71 P8.1
PB0: P7.18 P8.9 U1.26 | length 1038.7
  Top Layer w8: U1.26 1187.83,621.33 1271.33,621.33 1386,736 1673,736 1765.1,643.9 P8.9
  Bottom Layer w8: P7.18 1690.61,875.79 1751.5,814.9 1751.5,781.9 1763.5,769.9 1763.5,727.9 1808.5,682.9 P8.9
PB1: P7.8 P8.21 U1.27 | length 1175.7
  Top Layer w8: U1.27 1198.67,638.33 1264.16,638.33 1271.92,646.08 1272.04,646.08 1382.96,757 1690,757 1753.1,693.9 1835.5,693.9 1885.5,743.9 P8.21
  Bottom Layer w8: P7.8 1539.87,954.53 1568.5,925.9 1568.5,865.9 1611.5,822.9 1611.5,770.9 1625.5,756.9 1626.5,757.9 v1(1686.5,757.9)
PB4: P5.25 P6.4 U1.56 | length 977.9
  Top Layer w8: P5.25 321.5,1143.9 453.5,1011.9 769.42,1011.9 U1.56
  Bottom Layer w8: P5.25 186.5,1143.9 225.09,1182.49 225.09,1243.09 P6.4@244.49,1262.49
  Bottom Layer w10: P6.4@244.49,1262.49 P6.4@292.13,1262.49
PB5: P5.4 P6.23 U1.57 | length 1312.6
  Top Layer w8: P5.4 113.5,1088.9 293.5,1088.9 332.5,1049.9 332.5,1049.37 347.98,1033.9 402.5,1033.9 442.5,993.9 759.58,993.9 U1.57 ; v1@200.5,1208.9 213.5,1208.9 232,1227.4 v1@255.5,1227.4
  Bottom Layer w8: P5.4 58.5,1144.9 100.5,1186.9 191.5,1186.9 202.5,1197.9 ; v1@255.5,1224.42 263.08,1232 395.61,1232 426.09,1262.49 P6.23@470.87,1262.49
  other v1: 200.5,1209.9 255.5,1229.9
PB6: P5.24 P6.5 U1.58 | length 921.6
  Top Layer w8: P5.24@158.5,1028.9 P5.24 305.5,1043.9 333.11,1016.29 390.11,1016.29 431.5,974.9 750.75,974.9 U1.58
  Bottom Layer w8: P5.24 158.5,1058.35 175.05,1074.9 200.5,1074.9 225.5,1099.9 225.5,1137.12 P6.5@274.13,1185.75
PB7: P5.5 P6.22 U1.59 | length 1346
  Top Layer w8: P5.5 93.5,1043.9 143,994.4 182.48,994.4 218.98,957.9 739.91,957.9 U1.59 ; v1@198.5,1111.9 304.5,1111.9 v1@356.5,1059.9
  Bottom Layer w8: P5.5 72.5,1043.9 128.5,1099.9 183.5,1099.9 195.5,1111.9 v1@198.5,1111.9 ; v1@356.5,1059.9 356.21,1059.9 355.21,1060.9 355.21,1104.61 431.5,1180.9 464.53,1180.9 470.87,1174.56 P6.22@470.87,1183.75
  other v1: 356.5,1065.9 200.5,1111.9
PB8: P5.23 P6.6 U1.61 | length 851.5
  Top Layer w8: P5.23 161.5,940.9 701.23,940.9 U1.61
  Bottom Layer w8: P5.23 165.86,943.9 209.86,987.9 210.03,987.9 223.5,1001.37 223.5,1056.38 P6.6@274.13,1107.01
PB9: P5.6 P6.21 U1.62 | length 1017.4
  Top Layer w8: v1@200.5,1008.9 214.5,994.9 354.5,994.9 v1@360.5,988.9 ; v1(356.5,911.9) 363.5,911.9 371.5,919.9 694.39,919.9 U1.62
  Bottom Layer w8: P5.6 67.5,943.9 113.5,989.9 181.5,989.9 v1@200.5,1008.9 ; v1@356.5,986.9 363.5,979.9 v1@363.5,916.9 ; v1@360.5,988.9 360.5,1032.5 433.01,1105.01 P6.21@470.87,1105.01
  other v1: 356.5,989.9 200.5,1010.9
PB10: P7.19 P8.8 U1.29 | length 965.1
  Top Layer w8: U1.29 1231.78,660.9 1262.69,660.9 1264.88,663.08 1265,663.08 1382.81,780.9 1413.57,780.9 1413.76,780.71 1413.94,780.9 1742.5,780.9 1779.5,743.9 P8.8
  Bottom Layer w8: P7.19 1705.87,954.53 1747.5,912.9 1747.5,842.94 1808.5,781.94 P8.8
PB13: P3.3 P7.6 P8.23 U1.34 | length 1945
  Top Layer w8: P3.3 971.5,1281.9 v1(1043.5,1281.9) ; U1.34 1291.46,910.9 1748.5,910.9 1766.5,892.9 1857.5,892.9 P8.23
  Bottom Layer w8: v1(1043.5,1281.9) 1043.5,1337.9 1060.5,1354.9 1340.5,1354.9 1414.5,1280.9 1414.5,1186.5 1488.99,1112.01 P7.6 1544.39,1112.01 1571.5,1084.9 1571.5,1016.9 1610.5,977.9 1610.5,935.51 1633.12,912.9 1688.5,912.9 v1(1690.5,914.9)
PB14: P7.21 P8.6 U1.35 | length 844
  Top Layer w8: U1.35 1285.62,932.9 1649.5,932.9 1660.5,943.9 P8.6
  Bottom Layer w8: P7.21@1692.92,1112.01 1765.5,1039.42 1765.5,986.9 P8.6
PB15: P3.4 P7.5 P8.24 U1.36 | length 1886.6
  Top Layer w8: U1.36 1201.37,875.77 1275.5,949.9 1631.5,949.9 1676.5,994.9 1859.5,994.9 P8.24
  Bottom Layer w8: P3.4 1018.5,1228.9 1018.5,1344.9 1048.5,1374.9 1349.5,1374.9 1433.5,1290.9 1433.5,1230.9 1473.65,1190.75 P7.5 1541.65,1190.75 1591,1141.4 1591,1028.4 1625.5,993.9 v1(1690.5,993.9)
PC0: P5.8 P6.19 U1.8 | length 1313.7
  Top Layer w8: P5.8 58.5,726.9 98.98,686.43 176.12,686.43 187.65,674.9 221.5,674.9 303.5,756.9 v1(384.5,756.9) 510.1,756.9 571,696 571,597 655,513 700.48,513 797.38,609.9 798.1,609.9 822.04,633.84 U1.8
  Bottom Layer w8: v1(384.5,756.9) 380.5,752.9 380.5,754.9 358.5,776.9 358.5,814.5 396.5,852.5 396.5,890.5 453.53,947.53 P6.19@470.87,947.53
  other v1: 398.5,884.9
PC1: P5.20 P6.9 U1.9 | length 1231.8
  Top Layer w8: P5.20 218.5,643.9 306.5,731.9 502.1,731.9 553,681 553,590.96 647.96,496 709.53,496 U1.9
  Bottom Layer w8: P5.20@158.5,628.9 P5.20 174.74,660.13 176.27,660.13 187.8,671.67 ; 187.8,671.7 222.5,706.41 222.5,817.5 273.79,868.79 P6.9@292.13,868.79 ; P6.9@265.9,870.79 P6.9@274.13,870.79
PC2: P5.9 P6.18 U1.10 | length 1558.5
  Top Layer w8: P5.9 81.5,643.9 124.5,600.9 203.5,600.9 313.5,710.9 497.1,710.9 533,675 533,586.92 640.92,479 720.36,479 U1.10 ; v1@190.13,708.31 227.92,708.31 305.5,785.9 v1@389.5,785.9
  Bottom Layer w8: P5.9 58.5,654.9 96.5,692.9 174.72,692.9 v1@190.13,708.31 ; v1@389.5,785.9 389.5,812.5 P6.18@445.79,868.79
  other v1: 190.49,706.91 384.5,785.9
PC3: P5.19 P6.10 U1.11 | length 1309.5
  Top Layer w8: P5.19 189.61,575 519,575 632,462 731.08,462 759.98,490.9 760.1,490.9 U1.11
  Bottom Layer w8: P5.19@183.5,543.9 P5.19 221.8,607.19 221.8,657.62 237.08,672.9 342.11,672.9 362.5,693.29 362.5,744.5 316.95,790.05 P6.10@271.65,790.05 ; P6.10@274.13,792.05 P6.10@282.36,792.05
PC6: P7.22 P8.5 U1.37 | length 900.3
  Top Layer w8: U1.37 1266.94,969.9 1620.5,969.9 1694.5,1043.9 P8.5
  Bottom Layer w8: P7.22@1704.65,1190.75 1755.5,1139.9 1755.5,1117.9 1777.5,1095.9 1777.5,1074.9 P8.5
  Bottom Layer w10: P7.22 P7.22@1704.65,1190.75
PC7: P7.4 P8.25 U1.38 | length 1169.4
  Top Layer w8: U1.38 1258.1,988.9 1603.5,988.9 1710.5,1095.9 1865.5,1095.9 1908.5,1138.9 P8.25
  Bottom Layer w8: P7.4 1520.91,1269.49 1609.5,1180.9 1609.5,1086.9 1624.5,1071.9 v1@1695.5,1071.9
  other v1: 1695.5,1072.9
PC8: P7.23 P8.4 U1.39 | length 931.6
  Top Layer w8: U1.39 1250.26,1008.9 1594.5,1008.9 1729.5,1143.9 P8.4
  Bottom Layer w8: P7.23@1692.87,1269.49 1717.95,1269.49 1785.5,1201.94 1785.5,1166.9 P8.4
PC9: P7.3 P8.26 U1.40 | length 1240.5
  Top Layer w8: U1.40 1240.42,1026.9 1582.5,1026.9 1754.5,1198.9 1865.5,1198.9 1908.5,1241.9 P8.26
  Bottom Layer w8: P7.3 1549.17,1348.23 1592,1305.4 1592,1268.98 1633.08,1227.9 1735.5,1227.9 1754.5,1208.9 v1(1754.5,1194.9)
PC10: P5.28 P6.1 U1.51 | length 1094
  Top Layer w8: P5.28 211.5,1443.9 242.5,1412.9 242.5,1361.86 502.46,1101.9 800.19,1101.9 800.46,1102.17 818.34,1102.17 U1.51
  Bottom Layer w8: P5.28 208.5,1493.9 267.32,1493.9 P6.1@274.13,1500.71
PC11: P5.2 P6.25 U1.52 | length 1311
  Top Layer w8: P5.2 102.5,1387.9 212.5,1387.9 222.5,1377.9 222.5,1355.9 493.5,1084.9 807.78,1084.9 U1.52
  Bottom Layer w8: P5.2 P5.2@58.5,1361.9 ; v1@198.5,1387.9 386.5,1387.9 420.57,1421.97 P6.25@452.87,1421.97
  other v1: 200.5,1387.9
PC12: P5.27 P6.2 U1.53 | length 1036.6
  Top Layer w8: P5.27 207.5,1343.9 483.5,1067.9 796.94,1067.9 U1.53
  Bottom Layer w8: P5.27 158.5,1380.9 199.57,1421.97 P6.2@274.13,1421.97
PC13: P5.22 P6.7 U1.2 | length 914
  Top Layer w8: P5.22 163.03,843.9 172.03,852.9 415.1,852.9 444,824 556.48,824 688.48,692 710.65,692 U1.2
  Bottom Layer w8: P5.22 184.03,843.9 207.01,866.88 207.01,922.41 223.5,938.9 223.5,975.33 247.13,998.96 247.13,1009.5 265.9,1028.27 P6.7@274.13,1028.27
RESET: C5.2 K0.2 R2.2 U1.7 | length 1267.4
  Top Layer w8: U1.7 910.5,752.66 910.5,910.9 976.5,976.9 976.5,1086.9 1026.5,1136.9 1297.5,1136.9 v1(1372.5,1211.9) 1394.94,1211.9 C5.2 1423.06,1206.9 1589.71,1206.9 1617.4,1234.59 K0.2@1617.4,1279.85
SWCLK: P1.2 U1.49 | length 389.2
  Top Layer w8: P1.2 706.5,1299.9 764.5,1241.9 800.5,1241.9 835.5,1206.9 835.5,1140.69 U1.49
SWDIO: P1.3 U1.46 | length 497.7
  Top Layer w8: P1.3 845.5,1243.9 v1@873.5,1243.9 ; U1.46 1090.5,1044.01 1090.5,1060.9 1073.5,1077.9 1073.5,1080.9 v1@1077.62,1080.9
  Bottom Layer w8: v1@874.5,1242.9 913.5,1242.9 933.5,1222.9 933.5,1164.9 956.5,1141.9 1016.88,1141.9 v1@1075.69,1083.09
  other v1: 1073.5,1083.9 879.5,1242.9
VCC3.3: C1.1 C2.1 C3.1 C4.2 C8.2 C12.1 C13.2 C15.2 D15.2 F3.2 K1.1 L1.1 P1.4 P3.2 P4.2 P5.15 P5.16 P7.13 R2.1 R3.1 R4.1 R5.1 R6.1 U1.1 U1.19 U1.32 U1.48 U1.64 U3.3 U3.7 U3.8 | length 6800.1
  Top Layer w8: C1.1 618.54,804.9 753.71,804.9 ; 1207.19,769 1290.19,852 1348.44,852 C2.1 ; P4.2 P4.2@1372.5,389.37 ; v3(1541.5,599.9) 1569.61,628 U3.8 U3.7
  Top Layer w12: C12.1 582.94,1239.9 725.5,1239.9 771.5,1193.9 P3.2 ; C8.2 654.5,65.34 L1.1 1025.7,133.46 1116.27,42.9 1192.61,42.9 1217,18.5 1413.11,18.5 1437.5,42.9 1437.5,334.9 1399.5,372.9 P4.2 ; U1.1 753.71,762.9 753.71,804.9 ; U1.64 753.71,804.9 ; v3(890.5,814.9) 880.5,804.9 753.71,804.9 ; v3(997.5,618.9) 1011.5,618.9 1026.5,603.9 1026.5,587.78 U1.19 ; v3@999.11,971.9 999.11,1008.29 U1.48 ; v3(1051,799) 1063,799 1085,777 1199.19,777 U1.32 ; U3.3 1453.67,527.94 v3(1463.61,518) 1463.61,478.61 1381.5,396.5 P4.2@1372.5,396.5
  Bottom Layer w8: v1@1364,846 v1(1364,848) R2.1@1364,1157.83 ; C13.2 R6.1@1545.62,318.34
  Bottom Layer w12: P5.15 P5.16 169.5,254.9 336.26,254.9 343.37,262.01 454.39,262.01 558.5,157.9 558.5,133.54 585.15,106.9 620.5,106.9 635.5,121.9 v3(635.5,132.9) 658.82,156.21 709.5,156.21 747.39,118.33 F3.2 770.5,130.33 D15.2 744,222.4 744,316.39 813.5,385.9 901.5,385.9 930.5,414.9 968.5,414.9 1010.06,456.46 C3.1 1010.06,486.34 974.5,521.9 974.5,783.4 980.5,789.4 980.5,954.9 ; R3.1 R3.1@626.06,1440.9 ; R5.1@694.44,1440.9 R3.1@626.06,1440.9 ; v3(890.5,814.9) 954.5,814.9 980.5,840.9 ; 974.5,633.9 993.5,614.9 v3(997.5,618.9) ; 982,787.9 994.11,800 1050,800 v3(1051,799) ; v3(1002.5,971.9) 997.5,971.9 980.5,954.9 ; P4.2 1381.5,363.9 1396.5,363.9 1409.5,350.9 1456.5,350.9 1480.06,374.46 C13.2 ; v3(1463.61,518) 1501.13,555.53 P7.13 1512.43,560.83 1541.5,589.9 v3(1541.5,599.9) ; R6.1@1545.62,318.34 R6.1 ; R3.1@626.06,1440.9 R4.1 804.5,1384.9 P1.4 P3.2 783.5,1144.9 834.5,1093.9 C4.2 955.94,1072.46 980.5,1047.9 980.5,954.9
VCC5: F2.1 P6.14 P6.15 P8.13 P8.14 | length 2190
  Top Layer w15: v5(388,473) 463,473 600.6,335.4 703,335.4 768.5,269.9 844.5,269.9 932.5,181.9 1092.5,181.9 v5(1091.5,182.9)
  Bottom Layer w15: v5(388,473) 390.05,473 470.87,553.83 P6.15@470.87,632.57 ; v5(1091.5,182.9) 1120.5,182.9 1156.5,146.9 1156.5,73.9 1210.4,20 1415.61,20 1433.5,37.9 1433.5,190.9 1507.5,264.9 1675.5,264.9 1796.5,143.9 P8.14 P8.13
  other v5: 843.5,269.9
VDDA: C9.2 C10.1 L1.2 U1.13 | length 662.4
  Top Layer w8: C10.1 648.94,209.9 L1.2 ; v1@803.5,468.9 803.5,478.62 U1.13@886.64,561.75
  Bottom Layer w8: C9.2 464.06,310.9 541.5,310.9 576.5,275.9 610.5,275.9 v1@803.5,468.9
  other v1: 632.5,298.9 801.5,467.9
VSSA: C9.1 C10.2 L2.2 U1.12 | length 656.3
  Top Layer w8: L2.2 578.07,207.9 C10.2 ; v1(769.5,467.9) 769.5,471.44 774.45,476.39 773.94,476.9 U1.12
  Bottom Layer w8: C9.1 538.94,354.46 597.5,295.9 609.5,307.9 609.5,308.42 622.98,321.9 623.5,321.9 v1(769.5,467.9)
  other v1: 597.5,298.9
pads on no net: H0.0 H0.1 H0.2 H0.3 H0.4 H0.5 H0.6 H0.7 H0.8 H1.0 H1.1 H1.2 H1.3 H1.4 H1.5 H1.6 H1.7 H1.8 K0.3 K0.4 Y2.

## Polygon pours and split planes (outlines as drawn)
GND on Bottom Layer "Bottom Layer-No Net" (solid, remove dead copper, pour order 20): 2028,1628 -40,1628 -93,1575 -16,1498 -16,-66 1954,-66 2007,-13
GND on Top Layer "Bottom Layer-No Net" (solid, remove dead copper, pour order 22): -32,-49 -20,-37 -20,1673 1987,1673 2032,1628 2024,1620 2024,-70

## Keep-outs
Keep-Out Layer:
  lines w1: -13,-1 -12,0 33.9,0 ; 0,33.9 0,-13 1,-14
  lines w7: 0,33.9 ccw(c33.9,33.9) 33.9,0 34.41,0 1938.5,0 ccw(c1938.5,30) 1968.5,30 1968.5,33.9 1968.5,1540.39 ccw(c1933.8,1540.1) 1933.5,1574.8 34.41,1574.8 ccw(c34.41,1540.39) 0,1540.39 0,33.9

## Other copper
Bottom Layer:
  text "HEU-EV-Lab" at 1232,1425 h70
  text "Felix Kun" at 901,971 h70

## Silkscreen, mask and mechanical layers (free items; w line width, h text height)
Top Overlay:
  lines w7: 8.5,98.9 8.5,1486.9 8.5,1492.9 9.5,1493.9 208.5,1493.9 208.5,98.9 ; 1758.5,98.9 1758.5,1493.9 1959.5,1493.9 1959.5,98.9 1758.5,98.9
  text "C10" at 265,1497 h60 r270
  text "A15" at 217,1496 h60 r270
  text "A11" at 1749,1406 h60 r90
  text "A12" at 1696.64,1402.9 h60 r90
  text "C12" at 265,1385.9 h60 r270
  text "C11" at 217,1384.9 h60 r270
  text "A9" at 1748.36,1311 h60 r90
  text "A10" at 1696,1299 h60 r90
  text "B3" at 217,1272 h60 r270
  text "D2" at 264.36,1272 h60 r270
  text "A8" at 1696,1218.9 h60 r90
  text "C9" at 1748.36,1217.9 h60 r90
  text "RES" at 1505,1188 h60
  text "B5" at 217,1171.9 h60 r270
  text "B4" at 264.36,1170.9 h60 r270
  text "C7" at 1748.36,1117 h60 r90
  text "C8" at 1678.47,1114 h60 r90
  text "GND" at 616,1093.53 h60
  text "3.3" at 743,1093.53 h60
  text "SCL" at 829,1093.53 h60
  text "SDA" at 934,1093.53 h60
  text "RES" at 1052,1093.53 h60
  text "D/C" at 1168,1093.53 h60
  text "CS" at 1266,1093.53 h60
  text "B7" at 216.36,1073.9 h60 r270
  text "B6" at 265,1073.9 h60 r270
  text "OLED" at 564.5,1042.9 h60
  text "C6" at 1678.47,1012 h60 r90
  text "B15" at 1748.36,1006.9 h60 r90
  text "B9" at 217,973.9 h60 r270
  text "B8" at 265,973.9 h60 r270
  text "B14" at 1678,902.9 h60 r90
  text "B13" at 1748.36,903 h60 r90
  text "C14" at 217,892 h60 r270
  text "C13" at 265,892 h60 r270
  text "B11" at 1749,802 h60 r90
  text "B12" at 1678,800 h60 r90
  text "C15" at 265,784.9 h60 r270
  text "C0" at 217,768.9 h60 r270
  text "B1" at 1749,709 h60 r90
  text "B10" at 1678,698 h60 r90
  text "C2" at 217,671.9 h60 r270
  text "C1" at 265,671 h60 r270
  text "B0" at 1700,605 h60 r90
  text "C5" at 1748,601 h60 r90
  text "A0" at 217,571.9 h60 r270
  text "C3" at 265,568.9 h60 r270
  text "C4" at 1704,497 h60 r90
  text "A7" at 1749,496 h60 r90
  text "A2" at 216,483 h60 r270
  text "A1" at 268,481 h60 r270
  text "NRF" at 1163,456 h60
  text "A6" at 1702,407 h60 r90
  text "A5" at 1748.36,404.9 h60 r90
  text "FLASH" at 1460,398 h60
  text "GND" at 217,389.9 h60 r270
  text "BT0" at 265,380 h60 r270
  text "WKUP" at 1043,380 h60
  text "A4" at 1701,316 h60 r90
  text "A3" at 1748.36,312.9 h60 r90
  text "5V" at 1766,42 h60
  text "GND" at 1849,42 h60
  text "3.3" at 134,38 h60
  text "GND" at 10.5,36.9 h60
Bottom Overlay:
  text "TX1" at 1168,1554 h60 r180
  text "RX1" at 1272,1553.64 h60 r180
  text "GND" at 534,1553 h60 r180
  text "CLK" at 654,1553 h60 r180
  text "DIO" at 759,1553 h60 r180
  text "3.3V" at 853,1553 h60 r180
  text "GND" at 1046,1553 h60 r180
  text "STM32F103" at 1104,685 h60
  text "May You Succeed ！" at 1184,636 h60
Bottom Solder:
  text "HEU-EV-Lab" at 1232,1425 h70
  text "Felix Kun" at 900,971 h70
Mechanical 1:
  lines w7: -3.68,787.15 -0.43,783.9 ; 193.5,0 194.61,0 ; 198.5,1573.9 198.5,1574.8 ; 1768.5,1573.9 1768.5,1574.8